# Altium PCB PCB1.PcbDoc (part 2 of 2)
Units mm, origin at the board's own origin, x right, y up, seen from the top; angles counter-clockwise.
Board outline 63.44 x 74 mm, 2 copper layers (Top Layer, Bottom Layer), stack 1.571 mm thick; 46 components, 28 nets, 149 pads, 26 vias.
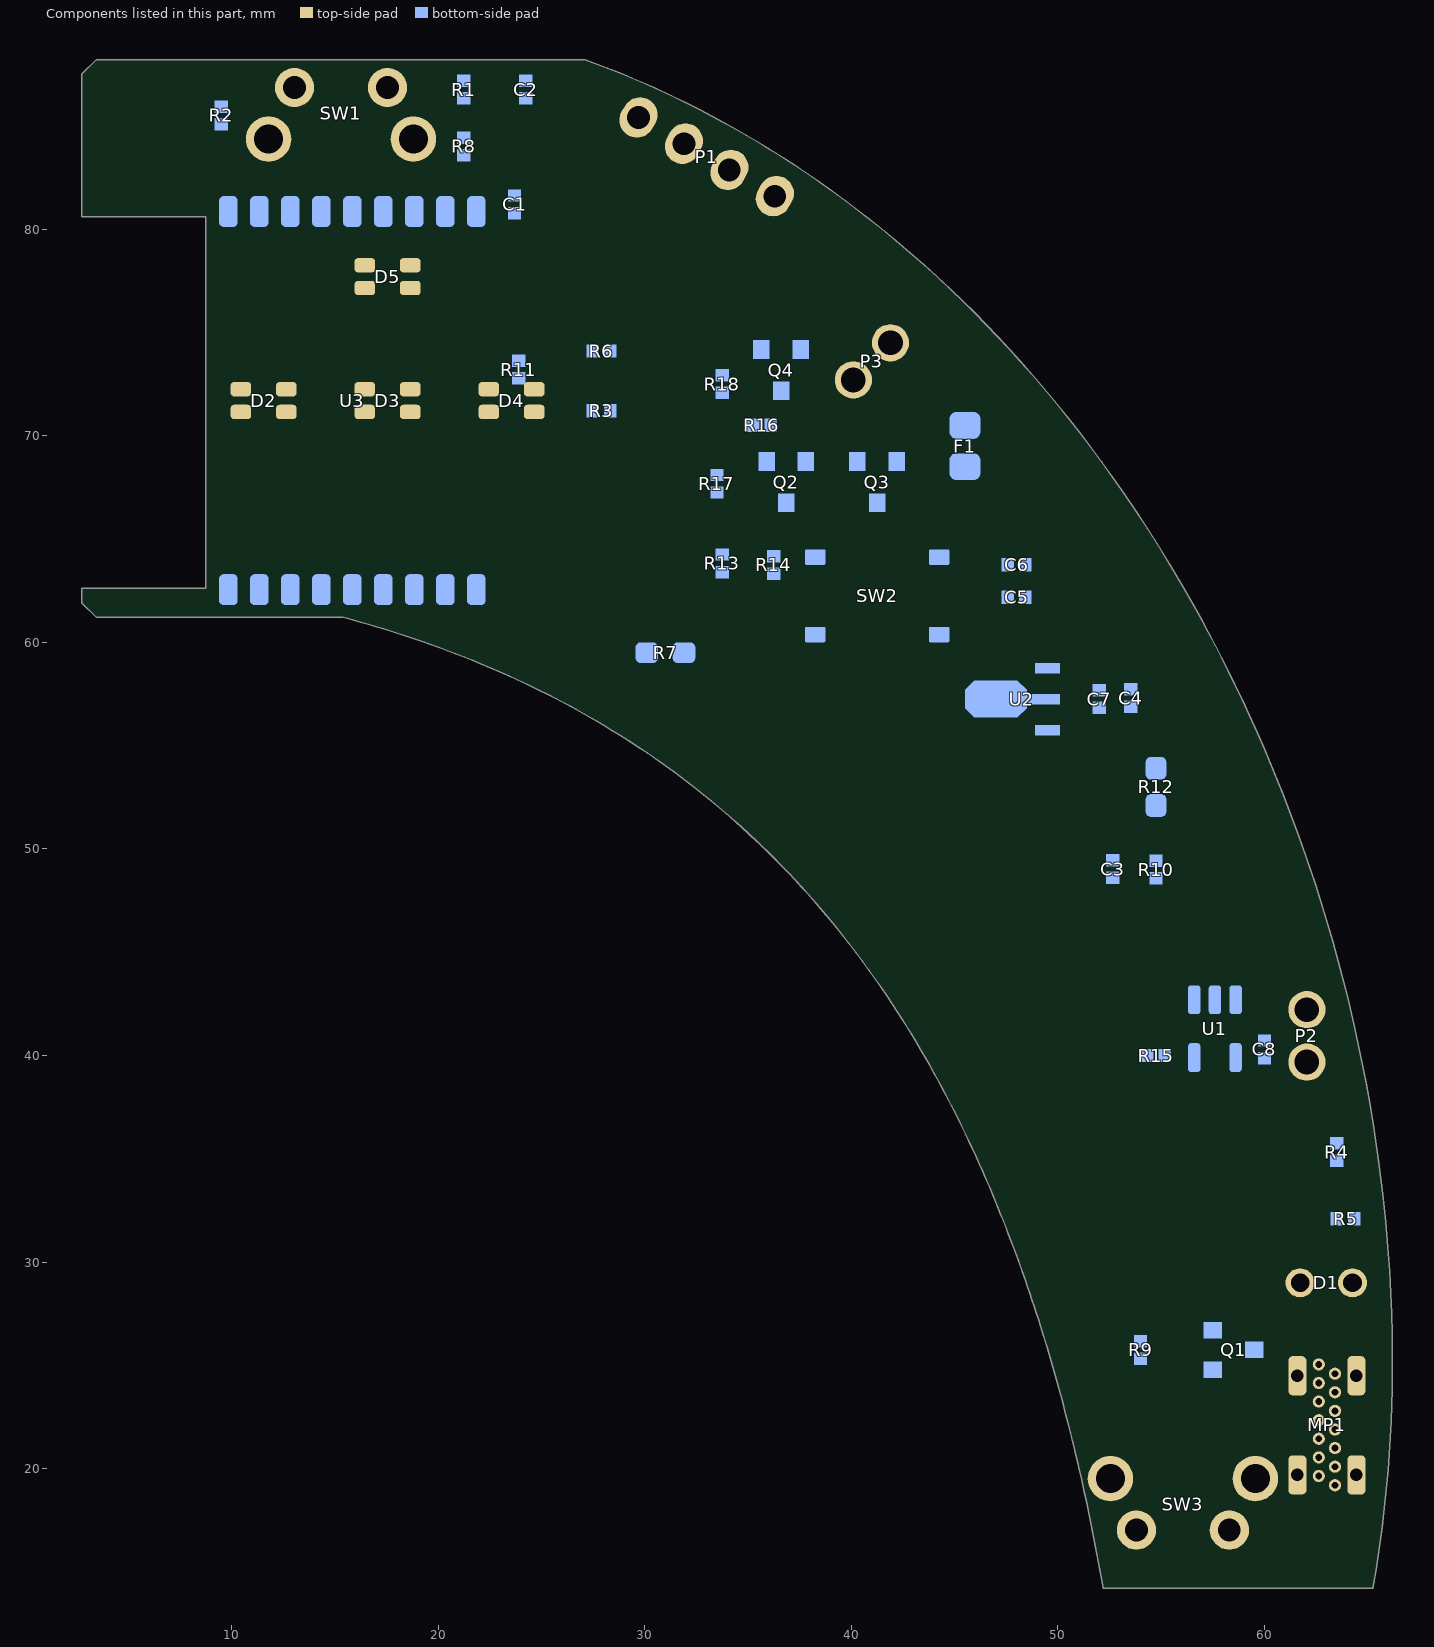
[diagram p2: the components of this part, seen from the top]

## Keep-outs
Keep-Out Layer:
  lines w0.2: 16.213,60.883 16.212,60.883 ; 16.588,60.775 16.588,60.775 ; 16.962,60.665 16.962,60.665 ; 17.334,60.552 17.333,60.552 ; 17.703,60.438 17.703,60.438 ; 18.071,60.321 18.07,60.321 ; 18.798,60.081 18.798,60.081 ; 19.158,59.958 19.159,59.958 ; 19.992,59.663 19.992,59.662 ; 20.404,59.51 20.404,59.51 ; 20.405,59.51 20.404,59.51 ; 20.814,59.355 20.813,59.355 ; 21.219,59.197 21.22,59.197 ; 21.624,59.036 21.623,59.036 ; 22.024,58.872 22.024,58.872 ; 22.478,58.681 22.478,58.681 ; 22.479,58.681 22.478,58.681 ; 23.375,58.288 23.375,58.287 ; 23.376,58.287 23.375,58.287 ; 23.818,58.085 23.818,58.085 ; 24.313,57.852 24.312,57.853 ; 24.801,57.616 24.801,57.615 ; 25.339,57.346 25.34,57.346 ; 25.34,57.346 25.34,57.346 ; 25.872,57.071 25.872,57.071 ; 26.451,56.761 26.451,56.761 ; 27.022,56.445 27.023,56.445 ; 38.571,46.896 38.57,46.897 ; 39.02,46.357 39.02,46.357 ; 39.425,45.855 39.425,45.855 ; 39.788,45.393 39.788,45.393 ; 39.789,45.392 39.788,45.393 ; 40.146,44.925 40.146,44.924 ; 40.147,44.924 40.146,44.924 ; 40.464,44.498 40.465,44.497 ; 40.778,44.066 40.779,44.066 ; 40.779,44.065 40.779,44.066 ; 41.089,43.629 41.089,43.629 ; 41.361,43.236 41.361,43.237 ; 41.896,42.442 41.896,42.441 ; 42.159,42.038 42.159,42.038 ; 42.387,41.681 42.387,41.681 ; 42.612,41.323 42.612,41.322 ; 43.055,40.595 43.055,40.595 ; 43.702,39.483 43.702,39.482 ; 43.883,39.16 43.883,39.16 ; 43.883,39.159 43.883,39.16 ; 44.062,38.835 44.062,38.835 ; 44.24,38.507 44.24,38.508 ; 44.762,37.514 44.763,37.513 ; 44.933,37.178 44.933,37.178 ; 45.27,36.501 45.27,36.5 ; 45.6,35.814 45.6,35.814 ; 45.763,35.467 45.762,35.468 ; 46.083,34.769 46.083,34.768 ; 46.083,34.768 46.083,34.768 ; 46.652,33.464 46.525,33.763 ; 46.652,33.464 46.779,33.163 ; 47.028,32.558 47.028,32.558 ; 47.394,31.639 47.394,31.639 ; 47.514,31.329 47.514,31.33 ; 48.209,29.442 48.209,29.442 ; 48.321,29.122 48.321,29.122 ; 48.432,28.8 48.432,28.801 ; 48.542,28.478 48.432,28.801 ; 48.542,28.478 48.65,28.153 48.758,27.828 ; 48.758,27.828 48.758,27.828 ; 49.178,26.509 49.178,26.51 ; 49.381,25.841 49.28,26.176 ; 49.381,25.842 49.481,25.505 ; 49.776,24.487 49.775,24.488 ; 49.966,23.802 50.06,23.456 ; 49.966,23.801 49.871,24.145 ; 50.06,23.456 50.06,23.456 ; 50.153,23.11 50.153,23.11 ; 50.245,22.761 50.245,22.762 ; 50.425,22.061 50.335,22.412 ; 50.425,22.061 50.514,21.708 ; 50.514,21.708 50.601,21.354 ; 50.601,21.354 50.601,21.354 ; 50.858,20.282 50.773,20.641 ; 50.858,20.283 50.941,19.922 51.024,19.561 ; 51.105,19.198 51.105,19.198 ; 51.498,17.36 51.498,17.36 ; 51.573,16.988 51.573,16.988 ; 51.647,16.615 51.648,16.614 ; 51.865,15.485 51.865,15.485 ; 66.276,23.877 cw(c66.176,23.877) 66.276,23.876 ; 66.277,26.528 ccw(c66.177,26.528) 66.277,26.53 ; 2.644,61.918 ccw(c2.744,61.918) 2.674,61.847 ; 2.644,61.918 ccw(c2.744,61.918) 2.674,61.847 ; 2.644,61.918 2.644,62.606 ; 2.644,62.606 cw(c2.744,62.606) 2.744,62.706 ; 2.644,62.606 cw(c2.744,62.606) 2.744,62.706 ; 2.644,80.606 ccw(c2.744,80.606) 2.744,80.506 ; 2.644,80.606 ccw(c2.744,80.606) 2.744,80.506 ; 2.644,80.606 2.644,87.495 ; 2.644,87.495 cw(c2.744,87.495) 2.674,87.566 ; 2.644,87.495 cw(c2.744,87.495) 2.674,87.566 ; 2.674,61.847 3.397,61.135 ; 2.674,87.566 3.397,88.278 ; 2.744,62.706 8.644,62.706 8.644,80.506 2.744,80.506 ; 3.397,61.135 ccw(c3.467,61.206) 3.467,61.106 ; 3.397,61.135 ccw(c3.467,61.206) 3.467,61.106 ; 3.397,88.278 cw(c3.467,88.206) 3.467,88.306 ; 3.397,88.278 cw(c3.467,88.206) 3.467,88.306 ; 3.467,61.106 15.403,61.106 15.834,60.989 ; 3.467,88.306 27.109,88.306 ; 15.834,60.989 15.834,60.989 ; 15.834,60.989 15.834,60.989 ; 15.834,60.989 16.212,60.883 ; 16.212,60.883 16.212,60.883 ; 16.212,60.883 16.588,60.775 ; 16.588,60.775 16.962,60.665 ; 16.588,60.775 16.589,60.775 ; 16.962,60.665 16.962,60.665 ; 16.962,60.665 17.333,60.552 ; 17.333,60.552 17.333,60.552 ; 17.333,60.552 17.703,60.438 ; 17.703,60.438 18.07,60.321 ; 17.703,60.438 17.703,60.438 ; 18.07,60.321 18.07,60.321 ; 18.07,60.321 18.435,60.202 ; 18.435,60.202 18.435,60.202 ; 18.435,60.202 18.798,60.081 ; 18.435,60.202 18.436,60.202 ; 18.798,60.081 19.159,59.958 ; 18.798,60.081 18.798,60.081 ; 19.159,59.958 19.577,59.812 ; 19.159,59.958 19.159,59.958 ; 19.577,59.812 19.992,59.662 ; 19.577,59.812 19.577,59.812 ; 19.576,59.812 19.577,59.812 ; 19.992,59.662 19.992,59.662 ; 19.992,59.662 20.404,59.51 ; 20.404,59.51 20.813,59.355 ; 20.813,59.355 20.813,59.355 ; 20.813,59.355 21.22,59.197 ; 21.22,59.197 21.623,59.036 ; 21.22,59.197 21.22,59.197 ; 21.623,59.036 21.623,59.036 ; 21.623,59.036 22.024,58.872 ; 22.023,58.872 22.024,58.872 ; 22.024,58.872 22.478,58.681 ; 22.478,58.681 22.929,58.486 ; 22.929,58.486 22.929,58.486 ; 22.928,58.486 22.929,58.486 ; 22.929,58.486 23.375,58.287 ; 23.375,58.287 23.818,58.085 ; 23.818,58.085 23.819,58.085 ; 23.818,58.085 24.312,57.853 ; 24.312,57.853 24.312,57.853 ; 24.312,57.853 24.801,57.615 ; 24.801,57.615 24.802,57.615 ; 24.801,57.615 25.34,57.346 ; 25.34,57.346 25.872,57.071 ; 25.871,57.071 25.872,57.071 ; 25.872,57.071 26.451,56.761 ; 26.45,56.762 26.451,56.761 ; 26.451,56.761 27.023,56.445 ; 27.023,56.445 27.639,56.091 ; 27.023,56.445 27.023,56.444 ; 27.109,88.306 cw(c27.109,88.206) 27.143,88.3 ; 27.109,88.306 cw(c27.109,88.206) 27.143,88.3 ; 27.109,88.306 27.109,88.306 ; 27.143,88.3 cw(c10.788,43.371) 29.65,87.307 cw(c10.587,42.9) 31.361,86.533 cw(c10.368,42.437) 32.719,85.86 cw(c10.129,41.973) 33.898,85.233 cw(c33.85,85.145) 33.898,85.233 cw(c9.888,41.532) 34.982,84.62 cw(c34.932,84.533) 34.982,84.619 cw(c9.615,41.063) 35.973,84.027 cw(c9.351,40.632) 36.876,83.46 cw(c9.062,40.181) 37.766,82.875 cw(c8.753,39.719) 38.571,82.323 cw(c8.432,39.259) 39.366,81.755 cw(c8.1,38.802) 40.151,81.173 ; 27.639,56.091 ccw(c27.689,56.177) 27.639,56.091 ; 27.64,56.09 cw(c5.759,18.698) 28.347,55.667 ccw(c28.4,55.752) 28.348,55.667 ; 27.64,56.09 ccw(c5.759,18.698) 27.639,56.091 ; 27.639,56.091 27.64,56.09 ; 28.348,55.667 ccw(c28.4,55.752) 28.348,55.667 ; 28.348,55.667 cw(c5.997,19.085) 29.143,55.169 ccw(c29.198,55.253) 29.144,55.168 ccw(c29.198,55.253) 29.144,55.168 cw(c6.218,19.43) 30.071,54.556 ; 30.071,54.556 ccw(c30.127,54.639) 30.071,54.556 ; 30.071,54.556 ccw(c30.127,54.639) 30.071,54.556 cw(c6.466,19.792) 31.353,53.65 ; 31.354,53.65 cw(c6.657,20.055) 36.132,49.547 ; 31.353,53.65 ccw(c31.413,53.73) 31.354,53.65 ; 36.132,49.547 ccw(c36.203,49.618) 36.132,49.547 ; 36.132,49.547 ccw(c36.203,49.618) 36.132,49.547 cw(c6.123,19.505) 36.9,48.76 ccw(c36.973,48.828) 36.9,48.759 cw(c5.795,19.193) 37.533,48.079 ccw(c37.607,48.147) 37.533,48.079 cw(c5.449,18.878) 38.075,47.472 ; 38.075,47.472 cw(c5.449,18.878) 38.075,47.472 ; 38.075,47.472 38.076,47.472 ; 38.075,47.472 ccw(c38.151,47.538) 38.076,47.472 ; 38.076,47.472 38.57,46.897 ; 38.57,46.897 39.02,46.357 ; 38.57,46.898 38.57,46.897 ; 39.02,46.357 39.425,45.855 ; 39.019,46.358 39.02,46.357 ; 39.425,45.855 39.788,45.393 ; 39.425,45.856 39.425,45.855 ; 39.788,45.393 40.146,44.924 ; 40.146,44.924 40.465,44.497 ; 40.151,81.173 ccw(c40.09,81.093) 40.151,81.173 ; 40.151,81.173 ccw(c40.09,81.093) 40.151,81.173 ; 40.151,81.173 40.854,80.632 ; 40.465,44.497 40.779,44.066 ; 40.465,44.497 40.465,44.497 ; 40.779,44.066 41.089,43.629 ; 40.854,80.632 cw(c40.793,80.553) 40.854,80.632 ; 40.854,80.632 cw(c40.793,80.553) 40.855,80.631 ; 40.854,80.632 40.854,80.632 ; 40.854,80.632 40.854,80.632 ; 40.855,80.631 ccw(c40.793,80.553) 40.854,80.632 ; 40.855,80.631 cw(c40.793,80.553) 40.855,80.631 ; 40.855,80.631 40.855,80.631 ; 40.855,80.631 40.855,80.631 ; 40.855,80.631 41.549,80.079 ; 41.089,43.629 41.361,43.237 ; 41.089,43.629 41.089,43.629 ; 41.361,43.237 41.63,42.841 ; 41.361,43.237 41.361,43.237 ; 41.549,80.078 cw(c41.487,80) 41.551,80.077 ; 41.549,80.078 cw(c41.487,80) 41.551,80.077 ; 41.549,80.078 ccw(c41.487,80) 41.549,80.079 ; 41.549,80.079 41.549,80.078 ; 41.549,80.078 41.549,80.078 ; 41.551,80.077 42.236,79.513 ; 41.63,42.841 41.631,42.841 ; 41.63,42.841 41.896,42.441 ; 41.63,42.841 41.63,42.841 ; 41.896,42.441 41.897,42.441 ; 41.896,42.441 42.159,42.038 ; 42.159,42.038 42.387,41.681 ; 42.159,42.038 42.159,42.037 ; 42.236,79.513 cw(c42.172,79.436) 42.237,79.512 ; 42.236,79.513 cw(c42.172,79.436) 42.238,79.512 ; 42.237,79.512 42.238,79.512 ; 42.238,79.512 42.913,78.937 ; 42.387,41.681 42.612,41.322 ; 42.386,41.682 42.387,41.681 ; 42.612,41.322 42.612,41.322 ; 42.612,41.322 42.835,40.96 ; 42.835,40.96 42.835,40.96 ; 42.835,40.96 43.055,40.595 ; 42.834,40.96 42.835,40.96 ; 42.914,78.937 cw(c42.849,78.861) 42.915,78.936 ; 42.913,78.937 cw(c42.849,78.861) 42.915,78.936 ; 42.913,78.937 42.914,78.937 ; 42.915,78.936 ccw(c42.849,78.861) 42.915,78.936 ; 42.915,78.936 42.915,78.936 ; 42.915,78.936 42.915,78.936 ; 42.915,78.936 43.583,78.35 ; 43.055,40.595 43.055,40.595 ; 43.055,40.595 43.273,40.227 ; 43.273,40.227 43.273,40.227 ; 43.273,40.227 43.273,40.227 ; 43.273,40.227 43.488,39.856 ; 43.488,39.856 43.489,39.856 ; 43.488,39.856 43.702,39.482 ; 43.488,39.857 43.488,39.856 ; 43.583,78.349 cw(c43.517,78.274) 43.584,78.348 ; 43.583,78.349 ccw(c43.517,78.274) 43.583,78.35 ; 43.583,78.349 cw(c43.517,78.274) 43.584,78.348 ; 43.583,78.349 43.583,78.349 ; 43.583,78.349 43.583,78.35 ; 43.584,78.348 ccw(c43.517,78.274) 43.584,78.348 ; 43.584,78.348 43.584,78.348 ; 43.584,78.348 44.243,77.751 ; 43.584,78.348 43.584,78.348 ; 43.702,39.482 43.883,39.16 ; 43.702,39.482 43.702,39.482 ; 43.883,39.16 44.062,38.835 ; 44.062,38.835 44.062,38.834 ; 44.062,38.835 44.24,38.508 ; 44.24,38.508 44.416,38.179 ; 44.24,38.508 44.24,38.508 ; 44.243,77.751 ccw(c44.176,77.677) 44.243,77.751 ; 44.243,77.751 cw(c44.176,77.677) 44.244,77.75 ; 44.243,77.751 cw(c44.176,77.677) 44.244,77.75 ; 44.243,77.751 44.243,77.751 ; 44.243,77.751 44.243,77.751 ; 44.244,77.75 44.894,77.142 ; 44.416,38.179 44.416,38.179 ; 44.416,38.179 44.416,38.178 ; 44.416,38.179 44.59,37.847 ; 44.59,37.847 44.763,37.513 ; 44.59,37.847 44.59,37.847 ; 44.59,37.847 44.59,37.847 ; 44.763,37.513 44.763,37.513 ; 44.763,37.513 44.933,37.178 ; 44.894,77.142 cw(c44.826,77.069) 44.895,77.141 ; 44.894,77.142 cw(c44.826,77.069) 44.895,77.141 ; 44.895,77.14 ccw(c44.826,77.069) 44.895,77.141 ; 44.895,77.14 44.895,77.141 ; 44.895,77.14 45.473,76.584 ; 44.895,77.141 44.895,77.141 ; 44.933,37.178 45.102,36.84 ; 44.933,37.178 44.934,37.178 ; 45.102,36.84 45.103,36.84 ; 45.102,36.84 45.27,36.5 ; 45.102,36.84 45.102,36.84 ; 45.27,36.5 45.27,36.5 ; 45.27,36.5 45.436,36.158 ; 45.436,36.158 45.6,35.814 ; 45.436,36.158 45.436,36.158 ; 45.436,36.158 45.436,36.158 ; 45.473,76.584 ccw(c45.403,76.512) 45.473,76.584 ; 45.473,76.584 cw(c45.403,76.512) 45.474,76.583 ; 45.473,76.584 cw(c45.403,76.512) 45.474,76.583 ; 45.473,76.584 45.473,76.584 ; 45.473,76.584 45.473,76.584 ; 45.474,76.583 46.044,76.018 ; 45.6,35.814 45.762,35.468 ; 45.6,35.814 45.6,35.814 ; 45.762,35.468 45.923,35.119 ; 45.762,35.468 45.762,35.468 ; 45.923,35.119 45.924,35.119 ; 45.923,35.119 46.083,34.768 ; 45.923,35.119 45.923,35.119 ; 46.044,76.018 cw(c45.974,75.947) 46.045,76.017 ; 46.044,76.018 cw(c45.974,75.947) 46.045,76.017 ; 46.045,76.017 46.608,75.444 ; 46.083,34.768 46.24,34.415 ; 46.24,34.415 46.24,34.415 ; 46.24,34.415 46.396,34.061 ; 46.24,34.416 46.24,34.415 ; 46.396,34.061 46.525,33.763 ; 46.396,34.061 46.396,34.061 ; 46.396,34.061 46.396,34.06 ; 46.525,33.763 46.525,33.763 ; 46.525,33.763 46.525,33.763 ; 46.608,75.444 cw(c46.537,75.374) 46.609,75.443 ; 46.608,75.444 cw(c46.537,75.374) 46.609,75.443 ; 46.609,75.443 47.165,74.862 ; 46.779,33.163 46.779,33.163 ; 46.779,33.163 46.904,32.862 ; 46.779,33.164 46.779,33.163 ; 46.904,32.862 47.028,32.558 ; 46.904,32.862 46.904,32.861 ; 46.904,32.862 46.904,32.862 ; 47.028,32.558 47.028,32.558 ; 47.028,32.558 47.151,32.253 ; 47.151,32.253 47.273,31.947 ; 47.151,32.254 47.151,32.253 ; 47.151,32.253 47.151,32.253 ; 47.166,74.861 ccw(c47.092,74.793) 47.165,74.862 ; 47.166,74.861 ccw(c47.092,74.793) 47.165,74.862 ; 47.166,74.861 47.714,74.272 ; 47.273,31.947 ccw(c47.366,31.984) 47.273,31.947 ; 47.273,31.947 47.394,31.639 ; 47.273,31.947 47.273,31.947 ; 47.394,31.639 47.514,31.33 ; 47.394,31.639 47.394,31.639 ; 47.514,31.33 47.633,31.018 47.75,30.706 ; 47.514,31.33 47.514,31.33 ; 47.714,74.272 cw(c47.641,74.204) 47.715,74.271 ; 47.714,74.272 cw(c47.641,74.204) 47.715,74.271 ; 47.715,74.271 48.256,73.674 ; 47.715,74.271 47.715,74.271 ; 47.75,30.706 47.866,30.393 ; 47.75,30.706 47.75,30.706 ; 47.75,30.706 47.75,30.706 ; 47.866,30.392 47.982,30.077 48.096,29.76 48.209,29.442 ; 47.866,30.393 47.866,30.392 ; 47.866,30.392 47.866,30.392 ; 47.866,30.393 47.866,30.392 ; 48.209,29.442 ccw(c48.303,29.475) 48.209,29.442 ; 48.209,29.442 48.321,29.122 ; 48.209,29.442 48.209,29.442 ; 48.209,29.442 48.209,29.442 ; 48.256,73.674 cw(c48.182,73.607) 48.257,73.673 ; 48.256,73.674 48.256,73.674 cw(c48.182,73.607) 48.257,73.673 ; 48.257,73.673 48.849,73.001 ; 48.321,29.122 ccw(c48.415,29.155) 48.321,29.122 ; 48.321,29.122 48.432,28.801 ; 48.321,29.122 48.321,29.122 ; 48.321,29.122 48.321,29.122 ; 48.432,28.801 48.432,28.801 ; 48.758,27.828 48.758,27.827 ; 48.758,27.828 48.865,27.5 ; 48.849,73.001 cw(c48.774,72.934) 48.85,72.999 ; 48.849,73.001 cw(c48.774,72.934) 48.85,73 ; 48.85,72.999 ccw(c48.774,72.934) 48.85,73 ; 48.85,72.999 48.85,72.999 ; 48.85,73 48.85,72.999 ; 48.85,72.999 49.433,72.318 ; 48.865,27.5 48.97,27.171 ; 48.864,27.501 48.865,27.5 ; 48.865,27.5 48.865,27.5 ; 48.97,27.171 ccw(c49.065,27.202) 48.97,27.171 ; 48.97,27.171 49.074,26.841 ; 48.97,27.171 48.97,27.171 ; 48.97,27.171 48.97,27.171 ; 48.97,27.172 48.97,27.171 ; 49.074,26.841 ccw(c49.17,26.871) 49.074,26.841 ; 49.074,26.841 49.074,26.841 ; 49.074,26.841 49.074,26.841 ; 49.074,26.841 49.178,26.51 ; 49.074,26.841 49.074,26.841 ; 49.178,26.51 49.28,26.176 ; 49.28,26.176 49.28,26.176 ; 49.28,26.176 49.28,26.176 ; 49.433,72.318 cw(c49.357,72.253) 49.435,72.316 ; 49.434,72.318 cw(c49.357,72.253) 49.434,72.317 ; 49.434,72.318 ccw(c49.357,72.253) 49.433,72.318 ; 49.433,72.318 49.434,72.318 ; 49.433,72.318 49.433,72.318 ; 49.435,72.316 50.008,71.626 ; 49.434,72.317 49.435,72.316 ; 49.481,25.505 ccw(c49.577,25.534) 49.481,25.505 ; 49.481,25.505 49.58,25.168 ; 49.481,25.505 49.481,25.505 ; 49.58,25.168 ccw(c49.677,25.195) 49.58,25.168 ; 49.58,25.168 49.679,24.828 49.775,24.488 ; 49.58,25.168 49.581,25.167 ; 49.58,25.168 49.58,25.168 ; 49.58,25.168 49.58,25.168 ; 49.775,24.488 49.871,24.145 ; 49.775,24.488 49.775,24.488 ; 49.871,24.145 49.871,24.145 ; 49.871,24.145 49.871,24.145 ; 50.009,71.625 cw(c49.931,71.562) 50.009,71.625 ; 50.009,71.625 ccw(c49.931,71.562) 50.008,71.626 ; 50.009,71.625 ccw(c49.931,71.562) 50.008,71.626 ; 50.009,71.625 50.009,71.625 ; 50.009,71.625 50.009,71.625 ; 50.008,71.626 50.008,71.626 ; 50.009,71.625 50.574,70.926 ; 50.06,23.456 50.153,23.11 ; 50.06,23.457 50.06,23.456 ; 50.153,23.11 ccw(c50.25,23.135) 50.153,23.109 ; 50.153,23.11 50.153,23.11 ; 50.153,23.11 50.153,23.109 ; 50.153,23.109 50.245,22.762 ; 50.245,22.762 ccw(c50.341,22.787) 50.245,22.762 ; 50.245,22.762 50.335,22.412 ; 50.335,22.412 50.335,22.412 ; 50.335,22.412 50.335,22.412 ; 50.574,70.925 cw(c50.496,70.863) 50.575,70.924 ; 50.574,70.925 cw(c50.496,70.863) 50.575,70.924 ; 50.574,70.925 ccw(c50.496,70.863) 50.574,70.926 ; 50.574,70.926 50.574,70.925 ; 50.574,70.925 50.574,70.925 ; 50.575,70.924 51.13,70.216 ; 50.575,70.924 50.575,70.924 ; 50.601,21.354 50.688,20.998 ; 50.601,21.354 50.601,21.354 ; 50.688,20.998 ccw(c50.785,21.022) 50.688,20.998 ; 50.688,20.998 50.773,20.641 ; 50.688,20.998 50.688,20.998 ; 50.773,20.641 ccw(c50.871,20.664) 50.773,20.641 ; 50.773,20.641 50.773,20.641 ; 51.024,19.561 ccw(c51.121,19.583) 51.024,19.561 ; 51.024,19.561 51.105,19.198 ; 51.024,19.561 51.024,19.561 ; 51.105,19.198 ccw(c51.203,19.22) 51.105,19.198 ; 51.105,19.198 51.186,18.833 51.265,18.467 ; 51.13,70.216 cw(c51.052,70.154) 51.131,70.215 ; 51.131,70.216 cw(c51.052,70.154) 51.131,70.215 ; 51.13,70.216 51.131,70.216 ; 51.132,70.215 ccw(c51.052,70.154) 51.131,70.215 ; 51.132,70.215 51.678,69.498 ; 51.131,70.215 51.132,70.215 ; 51.131,70.215 51.131,70.215 ; 51.265,18.467 ccw(c51.363,18.488) 51.265,18.467 ; 51.265,18.467 51.344,18.1 ; 51.265,18.467 51.265,18.467 ; 51.344,18.099 cw(c51.442,18.12) 51.344,18.1 ; 51.344,18.099 51.421,17.731 ; 51.344,18.099 51.344,18.1 ; 51.344,18.1 ccw(c51.442,18.12) 51.344,18.1 ; 51.344,18.1 51.344,18.1 ; 51.344,18.1 51.344,18.1 ; 51.344,18.1 51.344,18.1 ; 51.421,17.731 ccw(c51.519,17.751) 51.421,17.731 ; 51.421,17.731 51.421,17.73 ; 51.421,17.731 51.498,17.36 ; 51.498,17.36 ccw(c51.596,17.38) 51.498,17.36 ; 51.498,17.36 51.573,16.988 ; 51.573,16.988 ccw(c51.671,17.008) 51.573,16.988 ; 51.573,16.988 51.648,16.614 ; 51.648,16.614 ccw(c51.746,16.634) 51.648,16.614 ; 51.648,16.614 51.721,16.24 ; 51.678,69.498 cw(c51.598,69.437) 51.679,69.497 ; 51.678,69.498 cw(c51.598,69.437) 51.679,69.497 ; 51.678,69.498 ccw(c51.598,69.437) 51.678,69.498 ; 51.678,69.498 51.678,69.498 ; 51.678,69.498 51.678,69.498 ; 51.679,69.497 52.215,68.772 ; 51.721,16.24 ccw(c51.819,16.259) 51.721,16.24 ; 51.721,16.24 51.721,16.239 ; 51.721,16.24 51.793,15.863 ; 51.793,15.863 51.865,15.485 ; 51.793,15.863 51.793,15.863 ; 51.793,15.863 51.793,15.863 ; 51.865,15.485 ccw(c51.963,15.504) 51.865,15.485 ; 51.865,15.485 51.935,15.106 ; 51.935,15.106 ccw(c52.034,15.124) 51.935,15.106 ; 51.935,15.106 52.005,14.725 ; 51.935,15.106 51.935,15.106 ; 51.935,15.106 51.935,15.106 ; 51.935,15.106 51.935,15.106 ; 52.005,14.725 ccw(c52.103,14.743) 52.005,14.725 ; 52.005,14.725 52.073,14.343 ; 52.005,14.725 52.005,14.725 ; 52.005,14.725 52.005,14.725 ; 52.005,14.725 52.005,14.725 ; 52.073,14.343 ccw(c52.172,14.36) 52.073,14.342 ; 52.073,14.343 52.074,14.342 ; 52.073,14.342 52.101,14.189 ; 52.101,14.189 ccw(c52.199,14.206) 52.199,14.106 ; 52.101,14.189 ccw(c52.199,14.206) 52.199,14.106 ; 52.199,14.106 65.251,14.106 ; 52.216,68.771 ccw(c52.135,68.712) 52.215,68.772 ; 52.216,68.771 ccw(c52.135,68.712) 52.216,68.771 ; 52.216,68.771 ccw(c52.135,68.712) 52.215,68.772 ; 52.216,68.771 52.744,68.038 ; 52.216,68.771 52.216,68.771 ; 52.216,68.771 52.216,68.771 ; 52.744,68.038 cw(c52.663,67.979) 52.744,68.037 ; 52.744,68.038 52.744,68.038 ; 52.745,68.036 ccw(c52.663,67.979) 52.744,68.038 ; 52.745,68.036 ccw(c52.663,67.979) 52.744,68.037 ; 52.745,68.036 53.314,67.221 ; 52.745,68.036 52.745,68.036 ; 52.744,68.038 52.744,68.037 ; 53.314,67.221 cw(c53.232,67.164) 53.315,67.219 ; 53.314,67.221 cw(c53.232,67.164) 53.315,67.22 ; 53.314,67.221 53.314,67.221 ; 53.315,67.219 53.872,66.395 ; 53.315,67.22 53.315,67.219 ; 53.872,66.395 cw(c53.79,66.339) 53.873,66.394 ; 53.872,66.395 53.873,66.395 cw(c53.79,66.339) 53.873,66.394 ; 53.874,66.393 ccw(c53.79,66.339) 53.873,66.394 ; 53.874,66.393 54.42,65.56 ; 53.873,66.394 53.874,66.393 ; 53.873,66.394 53.873,66.394 ; 54.42,65.56 ccw(c54.336,65.505) 54.42,65.56 ; 54.42,65.56 cw(c54.336,65.505) 54.421,65.558 ; 54.42,65.56 cw(c54.336,65.505) 54.421,65.558 54.421,65.558 ; 54.42,65.56 54.42,65.56 ; 54.42,65.56 54.42,65.56 ; 54.421,65.558 55.003,64.639 ; 55.004,64.637 ccw(c54.919,64.585) 55.003,64.639 ; 55.004,64.637 ccw(c54.919,64.585) 55.003,64.639 ; 55.004,64.637 55.573,63.707 ; 55.003,64.639 55.003,64.639 ; 55.574,63.706 ccw(c55.488,63.655) 55.573,63.707 ; 55.574,63.706 ccw(c55.488,63.655) 55.573,63.707 ; 55.574,63.706 56.175,62.688 ; 56.175,62.688 cw(c56.089,62.637) 56.176,62.686 ; 56.175,62.688 cw(c56.089,62.637) 56.176,62.686 ; 56.176,62.686 56.76,61.657 ; 56.76,61.656 ccw(c56.673,61.608) 56.76,61.657 ; 56.76,61.656 cw(c-6.323,26.533) 57.372,60.535 cw(c-6.985,26.18) 58.006,59.32 cw(c57.917,59.274) 58.006,59.32 cw(c-7.679,25.827) 58.658,58.01 cw(c-8.366,25.494) 59.36,56.52 cw(c-9.067,25.173) 60.103,54.846 ; 56.76,61.656 ccw(c56.673,61.608) 56.76,61.657 ; 60.103,54.845 cw(c-9.764,24.875) 60.974,52.726 cw(c-10.517,24.579) 62.117,49.63 cw(c-11.01,24.405) 65.016,38.687 ; 60.103,54.845 ccw(c60.011,54.805) 60.103,54.846 ; 65.016,38.687 cw(c-9.702,24.667) 65.387,36.54 cw(c-8.928,24.79) 65.636,34.838 cw(c-8.172,24.892) 65.825,33.316 cw(c-7.398,24.98) 65.966,31.973 ; 65.016,38.687 ccw(c64.917,38.668) 65.016,38.687 ; 65.251,14.106 ccw(c65.251,14.206) 65.35,14.189 ; 65.251,14.106 ccw(c65.251,14.206) 65.35,14.189 ; 65.35,14.189 65.394,14.442 ; 65.394,14.442 ccw(c65.295,14.459) 65.394,14.443 ; 65.394,14.442 ccw(c65.295,14.459) 65.394,14.443 ; 65.394,14.443 65.506,15.119 ; 65.506,15.119 ccw(c65.407,15.135) 65.506,15.121 ; 65.506,15.119 ccw(c65.407,15.135) 65.506,15.12 ; 65.506,15.12 65.506,15.121 ; 65.506,15.121 65.61,15.798 ; 65.61,15.798 ccw(c65.512,15.814) 65.611,15.8 ; 65.611,15.799 ccw(c65.512,15.814) 65.611,15.8 ; 65.61,15.798 65.611,15.799 ; 65.611,15.8 65.708,16.482 ; 65.708,16.482 ccw(c65.609,16.496) 65.708,16.483 ; 65.708,16.483 ccw(c65.609,16.496) 65.708,16.483 ; 65.708,16.482 ccw(c65.609,16.496) 65.708,16.483 ; 65.708,16.483 65.708,16.483 ; 65.708,16.483 65.708,16.483 ; 65.708,16.483 65.797,17.167 ; 65.797,17.167 ccw(c65.698,17.18) 65.797,17.168 ; 65.797,17.167 ccw(c65.698,17.18) 65.797,17.168 ; 65.797,17.167 ccw(c65.698,17.18) 65.797,17.167 ; 65.797,17.167 65.797,17.167 ; 65.797,17.167 65.797,17.167 ; 65.797,17.168 ccw(c65.698,17.18) 65.797,17.168 ; 65.797,17.168 65.797,17.168 ; 65.797,17.168 65.797,17.168 ; 65.797,17.168 65.879,17.855 ; 65.879,17.855 ccw(c65.78,17.867) 65.879,17.855 ; 65.879,17.855 ccw(c65.78,17.867) 65.879,17.856 ; 65.879,17.855 ccw(c65.78,17.867) 65.879,17.856 ; 65.879,17.855 65.879,17.855 ; 65.879,17.855 65.879,17.855 ; 65.879,17.856 65.954,18.545 ; 65.954,18.545 ccw(c65.854,18.556) 65.954,18.546 ; 65.954,18.545 ccw(c65.854,18.556) 65.954,18.546 ; 65.954,18.546 ccw(c65.854,18.556) 65.954,18.546 ; 65.954,18.546 65.954,18.546 ; 65.954,18.546 65.954,18.546 ; 65.954,18.546 66.021,19.237 ; 65.966,31.972 ccw(c65.866,31.963) 65.966,31.973 ; 65.966,31.972 ccw(c65.866,31.963) 65.966,31.973 ; 65.966,31.972 66.074,30.721 ; 66.021,19.237 ccw(c65.921,19.247) 66.021,19.239 ; 66.021,19.237 ccw(c65.921,19.247) 66.021,19.237 ; 66.021,19.237 66.021,19.237 ; 66.021,19.237 66.021,19.237 ; 66.021,19.237 ccw(c65.921,19.247) 66.021,19.238 ; 66.021,19.238 66.021,19.239 ; 66.021,19.239 66.08,19.931 ; 66.074,30.719 ccw(c65.974,30.712) 66.074,30.721 ; 66.074,30.719 66.155,29.56 ; 66.074,30.719 66.074,30.719 ccw(c65.974,30.712) 66.074,30.721 ; 66.074,30.721 ccw(c65.974,30.712) 66.074,30.721 ; 66.074,30.721 66.074,30.721 ; 66.074,30.721 66.074,30.721 ; 66.08,19.932 ccw(c65.98,19.94) 66.08,19.933 ; 66.08,19.931 ccw(c65.98,19.94) 66.08,19.933 ; 66.08,19.931 66.08,19.932 ; 66.08,19.933 66.138,20.716 ; 66.138,20.716 ccw(c66.038,20.723) 66.138,20.717 66.138,20.717 ; 66.138,20.716 ccw(c66.038,20.723) 66.138,20.717 ; 66.138,20.717 66.187,21.502 ; 66.155,29.558 ccw(c66.055,29.552) 66.155,29.559 ; 66.155,29.558 ccw(c66.055,29.552) 66.155,29.56 ; 66.155,29.558 66.155,29.558 ; 66.155,29.558 66.213,28.489 ; 66.155,29.56 66.155,29.559 ; 66.187,21.502 ccw(c66.087,21.508) 66.187,21.503 ; 66.187,21.502 66.187,21.502 ccw(c66.087,21.508) 66.187,21.503 ; 66.187,21.503 66.226,22.29 ; 66.213,28.487 ccw(c66.113,28.483) 66.213,28.489 ; 66.213,28.487 ccw(c66.113,28.483) 66.213,28.489 ; 66.213,28.487 66.252,27.509 ; 66.213,28.489 66.213,28.489 ; 66.226,22.29 ccw(c66.126,22.295) 66.226,22.292 ; 66.226,22.29 ccw(c66.126,22.295) 66.226,22.291 ; 66.226,22.291 ccw(c66.126,22.295) 66.226,22.292 ; 66.226,22.292 66.226,22.292 ; 66.226,22.291 66.226,22.292 ; 66.226,22.292 66.256,23.081 ; 66.252,27.508 ccw(c66.152,27.505) 66.252,27.509 ; 66.252,27.508 ccw(c66.152,27.505) 66.252,27.509 ; 66.252,27.508 66.277,26.531 ; 66.256,23.081 ccw(c66.156,23.085) 66.256,23.081 ; 66.256,23.081 ccw(c66.156,23.085) 66.256,23.082 ; 66.256,23.081 ccw(c66.156,23.085) 66.256,23.082 ; 66.256,23.081 66.256,23.081 ; 66.256,23.081 66.256,23.081 ; 66.256,23.082 66.276,23.874 ; 66.276,23.874 ccw(c66.176,23.877) 66.276,23.876 ; 66.276,23.874 ccw(c66.176,23.877) 66.276,23.875 ; 66.276,23.875 66.276,23.876 ; 66.276,23.876 66.288,24.757 ; 66.277,26.53 ccw(c66.177,26.528) 66.277,26.531 ; 66.277,26.53 ccw(c66.177,26.528) 66.277,26.531 ; 66.277,26.53 66.288,25.644 ; 66.288,24.757 ccw(c66.188,24.759) 66.288,24.758 ; 66.288,24.757 66.288,24.757 ccw(c66.188,24.759) 66.288,24.758 ; 66.288,24.758 ccw(c66.188,24.759) 66.288,24.759 ; 66.288,24.758 66.288,25.642 ; 66.288,25.643 ccw(c66.188,25.643) 66.288,25.644 ; 66.288,25.642 ccw(c66.188,25.643) 66.288,25.643 ; 66.288,25.643 ccw(c66.188,25.643) 66.288,25.644 ; 66.288,25.642 ccw(c66.188,25.643) 66.288,25.643 ; 27.851,78.711 ccw(c30.751,78.711) 30.751,75.811 ccw(c30.751,78.711) 33.651,78.711 ccw(c30.751,78.711) 30.751,81.611 ccw(c30.751,78.711) 27.851,78.711 ; 53.791,33.597 ccw(c56.691,33.597) 56.691,30.697 ccw(c56.691,33.597) 59.591,33.597 ccw(c56.691,33.597) 56.691,36.497 ccw(c56.691,33.597) 53.791,33.597

## Silkscreen, mask and mechanical layers (free items; w line width, h text height)
Top Overlay:
  drawing of 21 lines, arcs and shapes, not listed
  text "TX" at 34.485,78.833 h1.52 r330
Bottom Overlay:
  text "JLCJLCJLCJLC" at 20.096,77.676 h1.3 r55
  text "TX" at 36.889,77.538 h1.52 r330
  text "Made by / Floris van der Heijde, Jorn van der Linden en Koen van Remundt" at 49.378,36.652 h0.8 r310
Top Solder:
  region: 478 vertices and 0 holes, not listed, extent 47.579,31.788 54.65,38.77
Mechanical 1:
  drawing of 215 lines, arcs and shapes, not listed
Mechanical 31:
  circle w0.013: c54.841,19.406 r3
  circle w0.013: c28.151,64.511 r3
  circle w0.013: c55.775,15.406 r3
  circle w0.013: c28.163,64.511 r3
  circle w0.013: c55.775,15.406 r3
  circle w0.013: c28.163,64.511 r3
  circle w0.013: c55.775,15.406 r3
  circle w0.013: c28.163,64.511 r3

## Text inside footprints (layer, text, board x,y; h text height)
P1: Top Overlay "1" at 37.297,80.442 h0.8 r330; Bottom Overlay "1" at 37.73,80.192 h0.8 r330
P2: Top Overlay "-" at 59.167,42.788 h1.6 r270; Top Overlay "+" at 58.969,40.292 h1.6 r270; Bottom Overlay "+" at 61.65,37.35 h0.8 r270; Bottom Overlay "-" at 61.825,44.275 h0.8 r270
P3: Top Overlay "+" at 38.354,75.311 h1.6 r225; Top Overlay "-" at 40.259,76.937 h1.6 r225; Bottom Overlay "-" at 40.25,76.75 h0.8 r225; Bottom Overlay "+" at 38,74.25 h0.8 r225